# EAGLE board module_pcb_v75 (EAGLE 9.7.0)
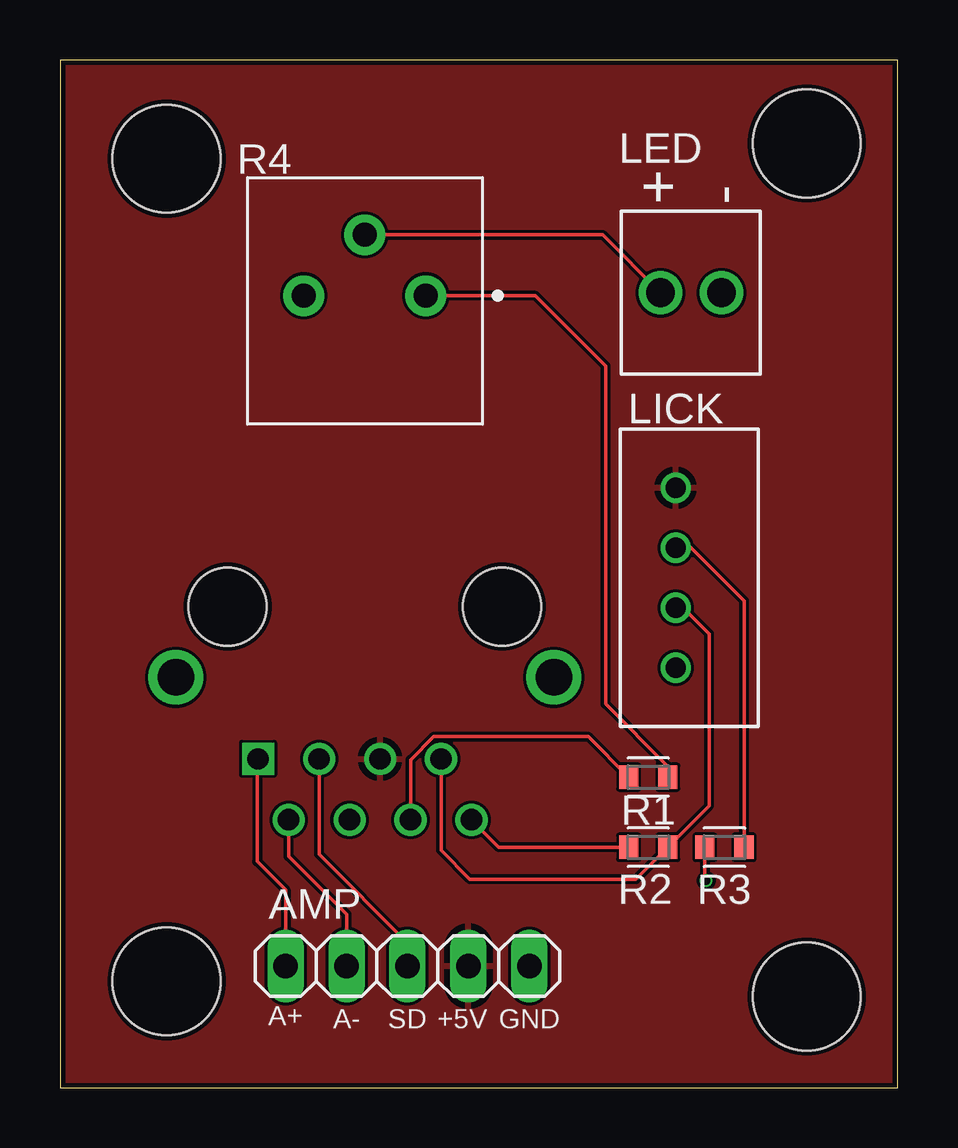
[diagram p0: board, top side]
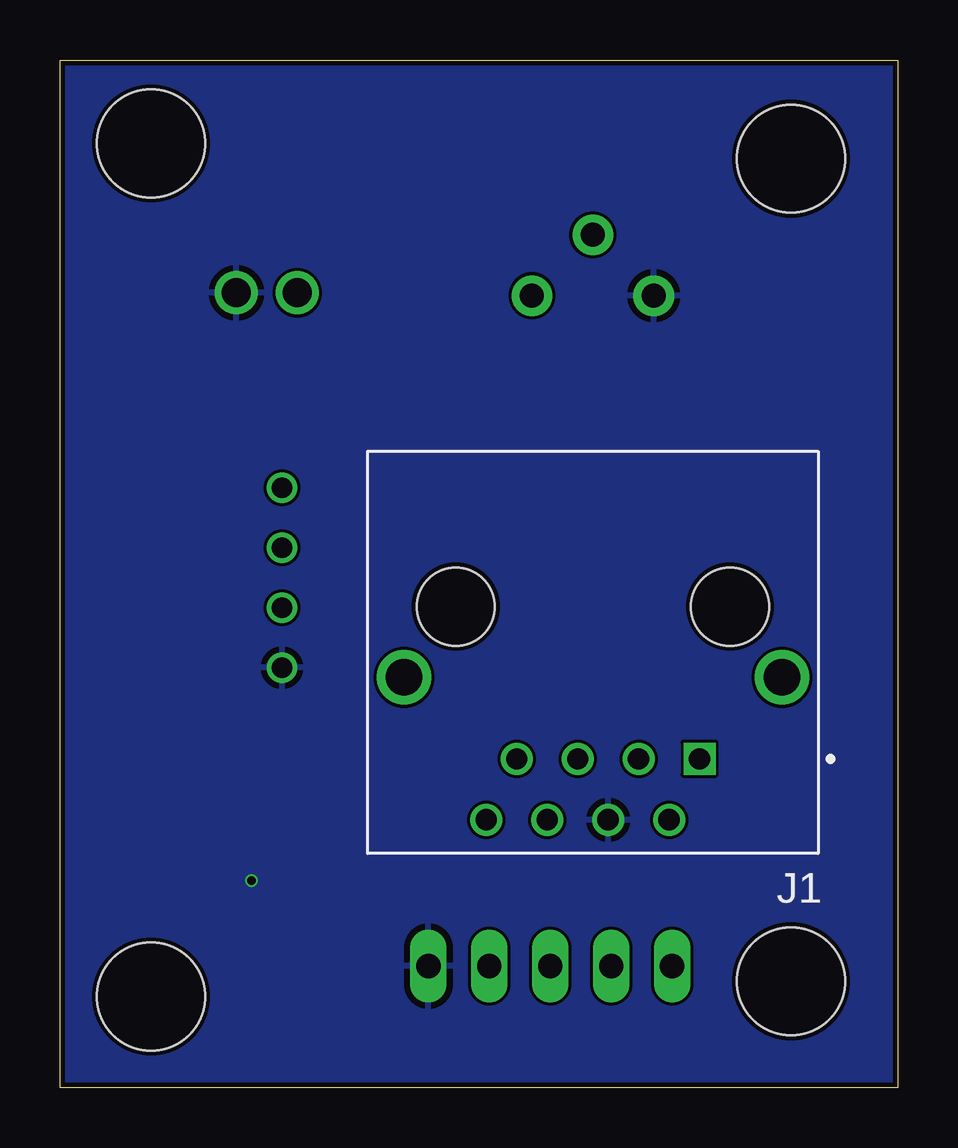
[diagram p1: board, bottom side, seen from below]

Size 34.91 x 42.85 mm. Coordinates in mm from the lower left corner, seen from the top.
Outline: 0,0 34.91,0 34.91,42.85 0,42.85 0,0
Copper layers (1*16): Top 0.035559375mm / dielectric 1.6mm / Bottom 0.035559375mm
Design rules "jlcpcb2layer": minimum track width 5mil, minimum drill 12mil, track to track 5mil, track to pad 5mil, pad to pad 5mil, via to via 5mil, smd to smd 5mil, copper to edge 8mil, drill to drill 6mil, minimum pad ring 5mil, minimum via ring 3mil, stop-mask expansion 2.5mil, vias tented up to drill 0mil, thermal gap 10mil
Holes 4.5 mm at 4.45,38.73 4.45,4.45 31.11,3.81 31.11,39.37

## Footprints (pad centres in the part's own frame; a part is rotated, then mirrored left to right if it is on the bottom)
1X05 = drill 1.016 long: 1 -5.08,0; 2 -2.54,0; 3 0,0; 4 2.54,0; 5 5.08,0
TE_5557969-1 = drill 0.89 square: 1 -4.445,6.35 | drill 0.89: 2 -3.175,8.89; 3 -1.905,6.35; 4 -0.635,8.89; 5 0.635,6.35; 6 1.905,8.89; 7 3.175,6.35; 8 4.445,8.89 | drill 1.52: S1 -7.875,2.95; S2 7.875,2.95 | hole 3.25: -5.715,0; 5.715,0
TERMBLK_254-2N = drill 1.2: 1 0,0; 2 2.54,0
B4B-XH-A = drill 0.84: 1 0,0; 2 2.5,0; 3 5,0; 4 7.5,0
RESC1608X60 = smd 0.799 x 0.974: 1 -0.815,0; 2 0.815,0
PV36P = drill 1 pad 1.7: 1 0,0; 2 2.54,-2.54; 3 5.08,0

## Placement (x,y rotation side)
AMP  PINHD-1X5  [1X05]  14.48,5.08 180 top
J1  5557969-1  [TE_5557969-1]  12.7,20.07 180 bottom
LED  2828XX-2282834-2  [TERMBLK_254-2N]  27.56,33.15 180 top
LICK  B4B-XH-A  [B4B-XH-A]  25.65,25.02 270 top
R1  220Ω  [RESC1608X60]  24.51,12.95 0 top
R2  22kΩ  [RESC1608X60]  24.51,10.03 0 top
R3  68Ω  [RESC1608X60]  27.69,10.03 0 top
R4  1kΩ  [PV36P]  15.24,33.02 180 top

## Library data of the parts
AMP = Connector; CATEGORY: Headers; DESCRIPTION: Header, Straight, 5 Position; MANUFACTURER: Generic; MPN: Generic; OPERATING_TEMPERATURE: Generic; PART_STATUS: Active; PITCH: 0.100" (2.54mm); ROHS_COMPLIANCE: Generic; SERIES: Generic; SUB-CATEGORY: Headers, Male Pins; TYPE: Board to Board or Cable, Unshrouded, Through Hole, Straight
J1 = 5557969-1; MANUFACTURER: TE Connectivity; PARTREV: E; STANDARD: Manufacturer Recommendation
LED = Connector; CATEGORY: Fixed Terminal Blocks; DESCRIPTION: Fixed Terminal Blocks 2P SIDE ENTRY 2.54mm; MANUFACTURER: TE Connectivity AMP Connectors; MPN: 282834-2; OPERATING_TEMPERATURE: -40°C ~ 105°C; PART_STATUS: Active; PITCH: 0.100" (2.54mm); ROHS_COMPLIANCE: RoHS Compliant; SERIES: Buchanan; SUBCATEGORY: Terminal Blocks; TYPE: Through Hole; Screw - Rising Cage Clamp; Side wire entry, Horizontal with Board
LICK = Connector; CATEGORY: Header; DSECRIPTION: Connector Header Through Hole 4 position 0.098" (2.50mm); MANUFACTURER: JST Sales America Inc.; MPN: B4B-XH-A(LF)(SN); OPERATING_TEMPERATURE: -25 C to 85 C; PART_STATUS: ACTIVE; PITCH: 0.098" (2.50mm); ROHS_COMPLIANCE: ROHS3 Compliant; SERIES: XH; SUB_CATEGORY: Rectangular Connectors; TYPE: Header, Male Pin, Board to Cable/Wire, Through Hole
R1-R3 = Resistor; CATEGORY: Resistor; SUB-CATEGORY: Fixed
R4 = Resistor; CATEGORY: Resistor; DESCRIPTION: Lead Sealed Type Multiturn PV36 Series; MANUFACTURER: BOURNS; MPN: PV36P; OPERATING_TEMPERATURE: -55 to +125 °C; PART_STATUS: Active; ROHS_COMPLIANCE: RoHS Compliant; SERIES: PV36; SUB-CATEGORY: Trimpot; TYPE: Lead Sealed

## Nets
+3.3V: J1.8 R2.1
+5V: AMP.2 J1.5 LICK.1
A+: AMP.5 J1.1
A-: AMP.4 J1.2
GND: AMP.1 J1.4 LED.1 LICK.4 R3.1 R4.3
LED_ON: J1.6 R1.1
LICK: J1.7 LICK.3 R2.2
N$1: LICK.2 R3.2
N$2: LED.2 R4.2
N$4: R1.2 R4.1
SD: AMP.3 J1.3

## Tracks (layer width: path | path; a pad name or v marks a point on that pad's centre or on a via)
+3.3V
  Top 0.152: R2.1 18.29,10.03 J1.8
+5V
  pour Top: 0.08,0.08 34.83,0.08 34.83,42.77 0.08,42.77
A+
  Top 0.152: AMP.5 9.4,8.25 8.22,9.44 8.22,13.68 J1.1
A-
  Top 0.152: AMP.4 11.94,7.24 9.53,9.65 J1.2
GND  (via drill 0.35)
  Top 0.152: R3.1 26.87,8.69 v26.92,8.64
  pour Bottom: 0.08,0.08 34.83,0.08 34.83,42.77 0.08,42.77
LED_ON
  Top 0.152: R1.1 22,14.65 15.57,14.65 14.61,13.68 J1.6
LICK
  Top 0.152: J1.7 15.88,9.91 17.08,8.7 23.99,8.7 R2.2 27.05,11.76 27.05,18.92 25.95,20.02 LICK.3
N$1
  Top 0.152: LICK.2 26.29,22.52 28.5,20.31 R3.2
N$2
  Top 0.152: R4.2 22.61,35.56 LED.2
N$4
  Top 0.152: R4.1 19.81,33.02 22.73,30.1 22.73,16 25.33,13.41 R1.2
SD
  Top 0.152: AMP.3 14.48,6.06 10.79,9.74 J1.3

## Text on the board
tNames: + | - | A+ | A- | SD | +5V | GND